# EAGLE board Add-OnV13 (EAGLE 6.3)
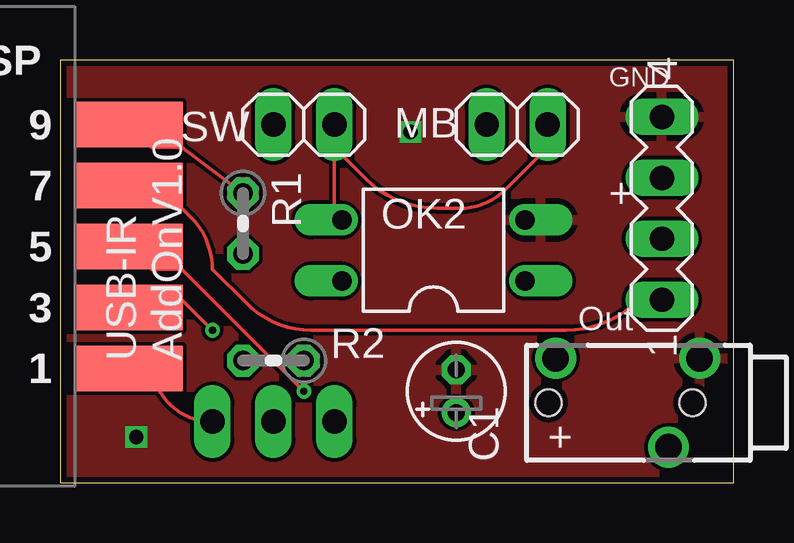
[diagram p0: board, top side]
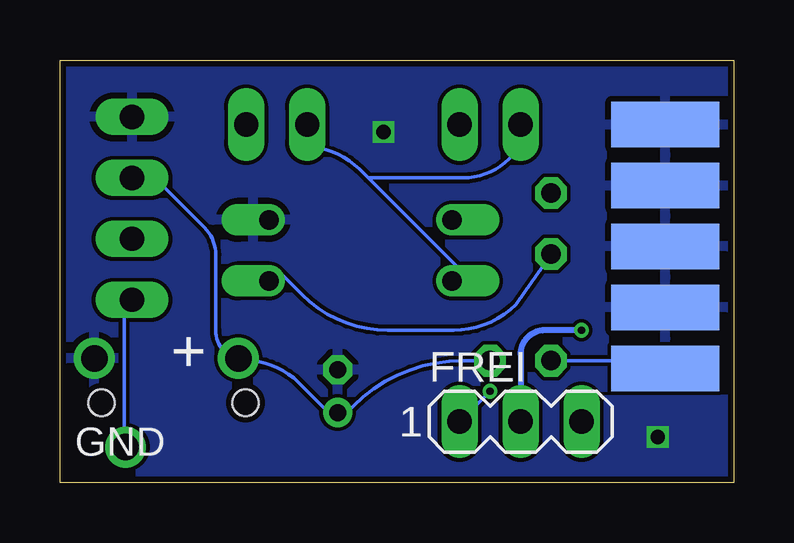
[diagram p1: board, bottom side, seen from below]

Size 28.08 x 17.61 mm. Coordinates in mm from the lower left corner, seen from the top.
Outline: 0,0 28.08,0 28.08,17.61 0,17.61 0,0
Copper layers (1*16): Top 0.035mm / dielectric 1.5mm / Bottom 0.035mm
Design rules "Fusion_eagle_rule_v1.1": minimum track width 6mil, minimum drill 12mil, track to track 6mil, track to pad 6mil, pad to pad 6mil, via to via 6mil, smd to smd 0mil, copper to edge 10mil, drill to drill 10mil, minimum pad ring 10mil, minimum via ring 6mil, stop-mask expansion 2mil, vias tented up to drill 100mil, thermal gap 10mil

## Footprints (pad centres in the part's own frame; a part is rotated, then mirrored left to right if it is on the bottom)
CON2X5EDGE = smd 4.5 x 1.9: P$1 0,5.08; P$3 0,2.54; P$5 0,0; P$7 0,-2.54; P$9 0,-5.08 | smd 4.5 x 1.9 bottom: P$2 0,5.08; P$4 0,2.54; P$6 0,0; P$8 0,-2.54; P$10 0,-5.08
E1,8-4 = drill 0.711 pad 1.168: + -0.889,0 | drill 0.711 pad 1.168 octagon: - 0.889,0
MA03-1 = drill 1.016 long: 1 -2.54,0; 2 0,0; 3 2.54,0
1X02 = drill 1.016 long: 1 -1.27,0; 2 1.27,0
DIL04 = drill 0.813 offset: 1 -1.27,-3.81; 2 1.27,-3.81; 3 1.27,3.81; 4 -1.27,3.81
0204V = drill 0.813 octagon: 1 -1.27,0; 2 1.27,0
MA04-1 = drill 1.016 long: 1 -3.81,0; 2 -1.27,0; 3 1.27,0; 4 3.81,0
1501_03 = drill 1.1 pad 1.7: 1 -1.85,0.3; 2 1.85,-1; 3 -1.85,-5.7 | hole 1.1: 0,0; 0,-6

## Placement (x,y rotation side)
2USB-ASP  CON2X5EDGE  [CON2X5EDGE]  2.86,9.84 180 top
C1  4,7uF  [E1,8-4]  16.51,3.81 90 top
FREI  [MA03-1]  8.89,2.54 0 bottom
MB  [1X02]  19.05,14.92 180 top
OK2  PC817  [DIL04]  15.56,9.68 90 top
R1  100  [0204V]  7.62,10.79 270 top
R2  560  [0204V]  8.89,5.08 180 top
SV1  [MA04-1]  25.08,11.43 90 top
SW  [1X02]  10.16,14.92 0 top
X1  1501_03  [1501_03]  26.35,3.33 270 top

## Library data of the parts
2USB-ASP = schwen
C1 R1 R2 = rcl
FREI SV1 = con-lstb; OC_FARNELL: unknown; OC_NEWARK: unknown
MB SW = pinhead
OK2 = optocoupler; MPN: PC817X4J000F; OC_FARNELL: 9707727; OC_NEWARK: 97K7059
X1 = con-lumberg; OC_FARNELL: 1200127; OC_NEWARK: unknown

## Nets
GND: 2USB-ASP.P$4 2USB-ASP.P$6 2USB-ASP.P$8 2USB-ASP.P$10 C1.- OK2.2 SV1.4 X1.1
MISO: 2USB-ASP.P$9 R1.1
MOSI: 2USB-ASP.P$1 FREI.3
N$1: C1.+ R2.1 SV1.3 X1.3
N$2: OK2.1 R1.2
N$3: MB.2 OK2.4 SW.1
N$4: MB.1 OK2.3 SW.2
NC: 2USB-ASP.P$3 FREI.2
RST: 2USB-ASP.P$5 FREI.1
SCK: 2USB-ASP.P$7 SV1.1 X1.2
VCC: 2USB-ASP.P$2 R2.2

## Tracks (layer width: path | path; a pad name or v marks a point on that pad's centre or on a via)
GND  (via drill 0.6)
  other vias: 3.17,1.91 14.61,14.61
  pour Bottom: 0,17.78 0,0 27.94,0 27.94,17.78
  pour Top: 0,17.78 27.94,17.78 27.94,0 0,0
MISO
  Top 0.152: R1.1 5.08,13.97 3.81,13.97 3.81,15.24 2USB-ASP.P$9
MOSI
  Top 0.152: FREI.3 arc-90 3.81,5.08 2USB-ASP.P$1
N$1
  Bottom 0.152: 20.32,5.08 arc45 18.15,4.18 16.51,2.54 | 16.51,2.54 15.86,3.19 arc45 11.3,5.08 R2.1 | 16.51,2.54 C1.+ | 20.32,5.08 arc90 21.59,6.35 21.59,9.5 arc-45 22.06,10.63 24.13,12.7 SV1.3 | 20.32,5.08 X1.3
N$2
  Bottom 0.152: R1.2 9.09,7.42 arc45 11.67,6.35 14.42,6.35 arc45 17.99,7.83 19.05,8.89 OK2.1
N$3
  Bottom 0.152: 15.24,12.7 15.61,13.07 arc-45 17.78,13.97 MB.2 | 15.24,12.7 11.43,8.89 OK2.4 | 15.24,12.7 11.28,12.7 arc-45 9.37,13.49 8.89,13.97 SW.1
N$4
  Top 0.152: 11.43,13.97 11.43,11.43 OK2.3 | 11.43,13.97 12.73,12.67 arc45 15.72,11.43 16.69,11.43 arc45 18.55,12.2 20.32,13.97 MB.1 | 11.43,13.97 SW.2
NC  (via drill 0.3)
  Top 0.152: v6.35,6.35 5.08,7.62 3.81,7.62 2USB-ASP.P$3
  Bottom 0.254: v6.35,6.35 7.89,6.35 arc-90 8.89,5.35 FREI.2
RST  (via drill 0.3)
  Top 0.152: v10.16,3.81 5.08,8.89 3.81,8.89 3.81,10.16 2USB-ASP.P$5
  Bottom 0.152: v10.16,3.81 FREI.1
SCK
  Top 0.152: 2USB-ASP.P$7 3.81,12.7 5.45,11.06 arc-45 6.35,8.89 7.77,7.47 arc45 10.47,6.35 21.06,6.35 arc45 24.13,7.62 SV1.1
  Bottom 0.152: SV1.1 25.4,7.62 25.4,1.27 X1.2
VCC
  Bottom 0.152: R2.2 3.81,5.08 2USB-ASP.P$2

## Text on the board
tNames: GND | + | Out | USB-IR / AddOnV1.0 | +
bNames: + | GND